# Altium PCB LTC2949.PcbDoc
Units mm, origin at the board's own origin, x right, y up, seen from the top; angles counter-clockwise.
Board outline 84.5 x 68.75 mm, 2 copper layers (Top Layer, Bottom Layer); 54 components, 56 nets, 195 pads, 8 vias.
Unrouted connection lines stored in the file: 1.
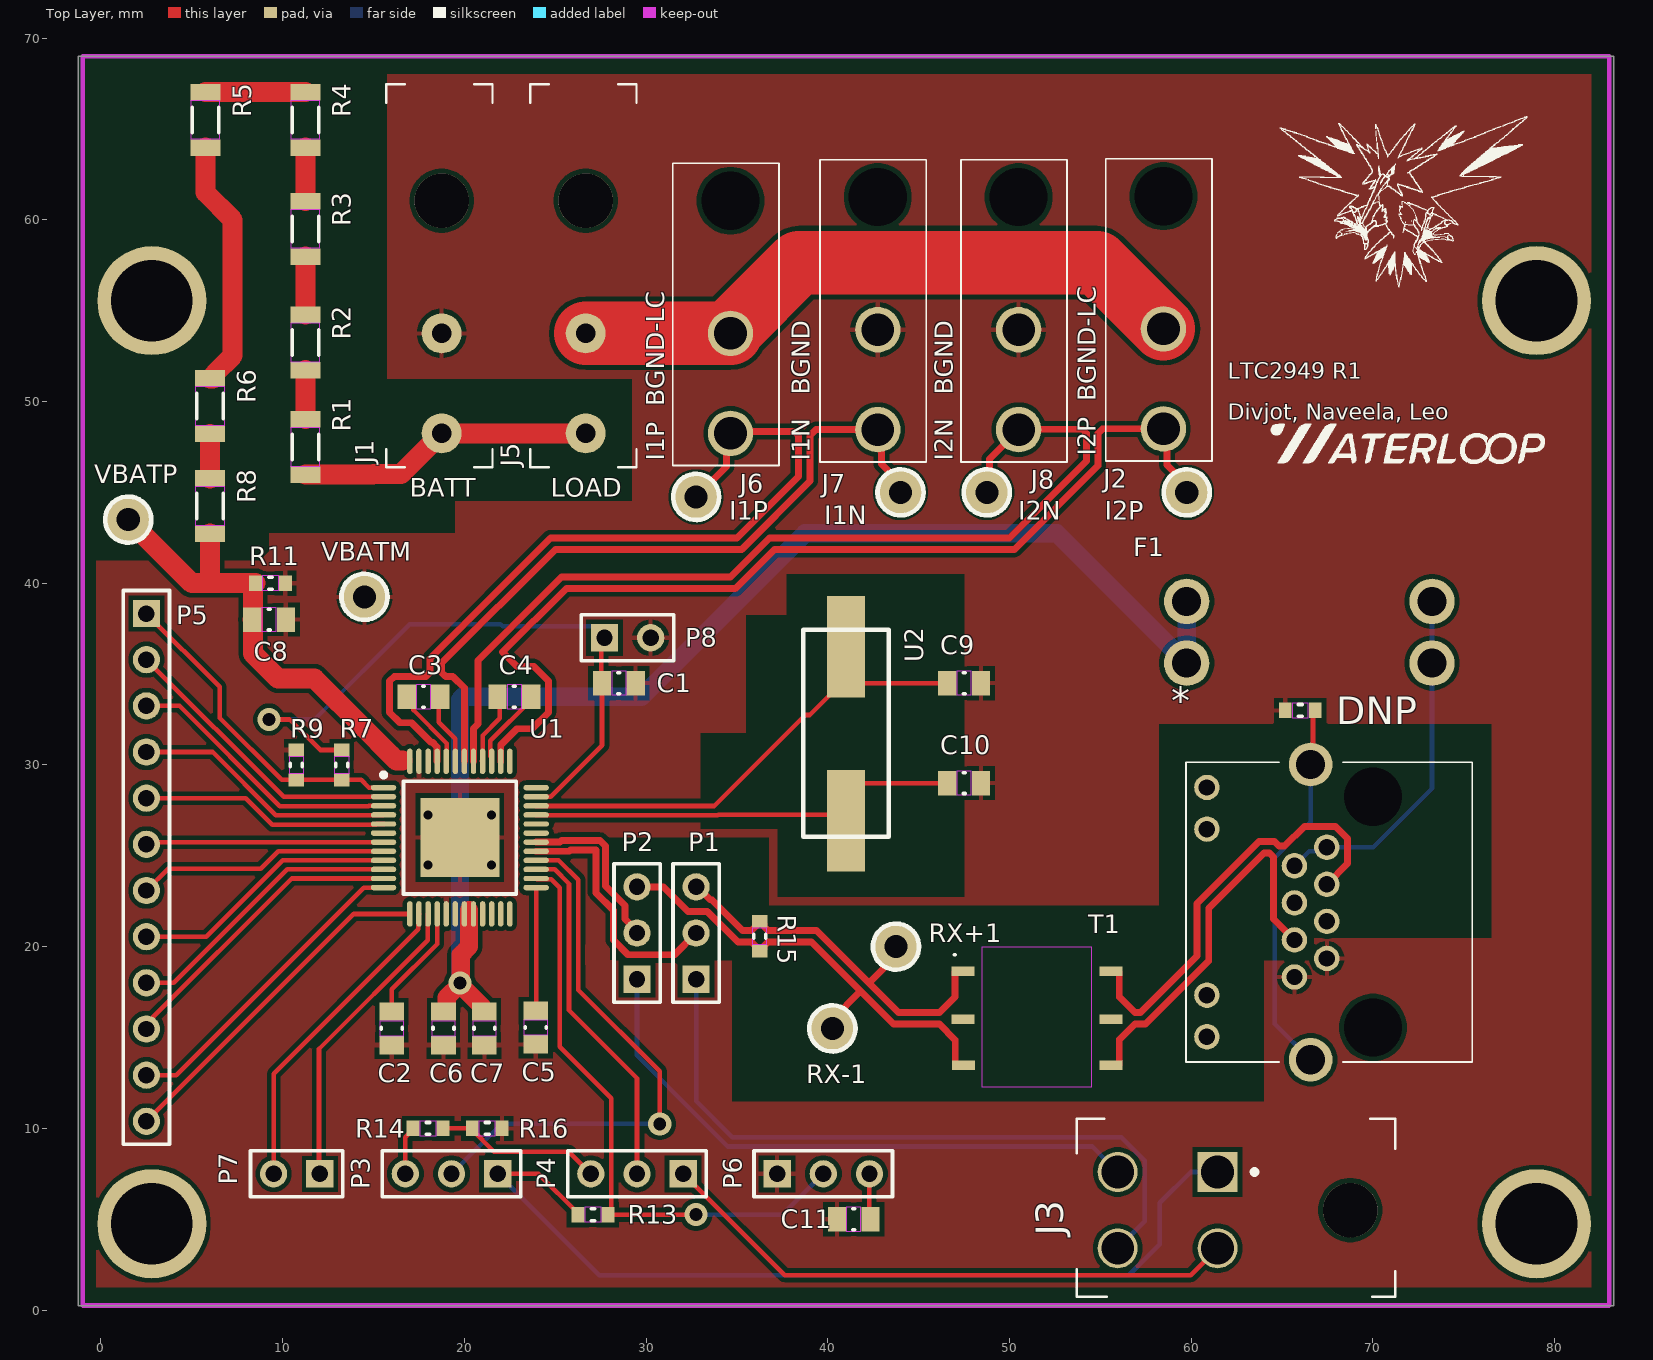
[diagram p0: Top Layer view]
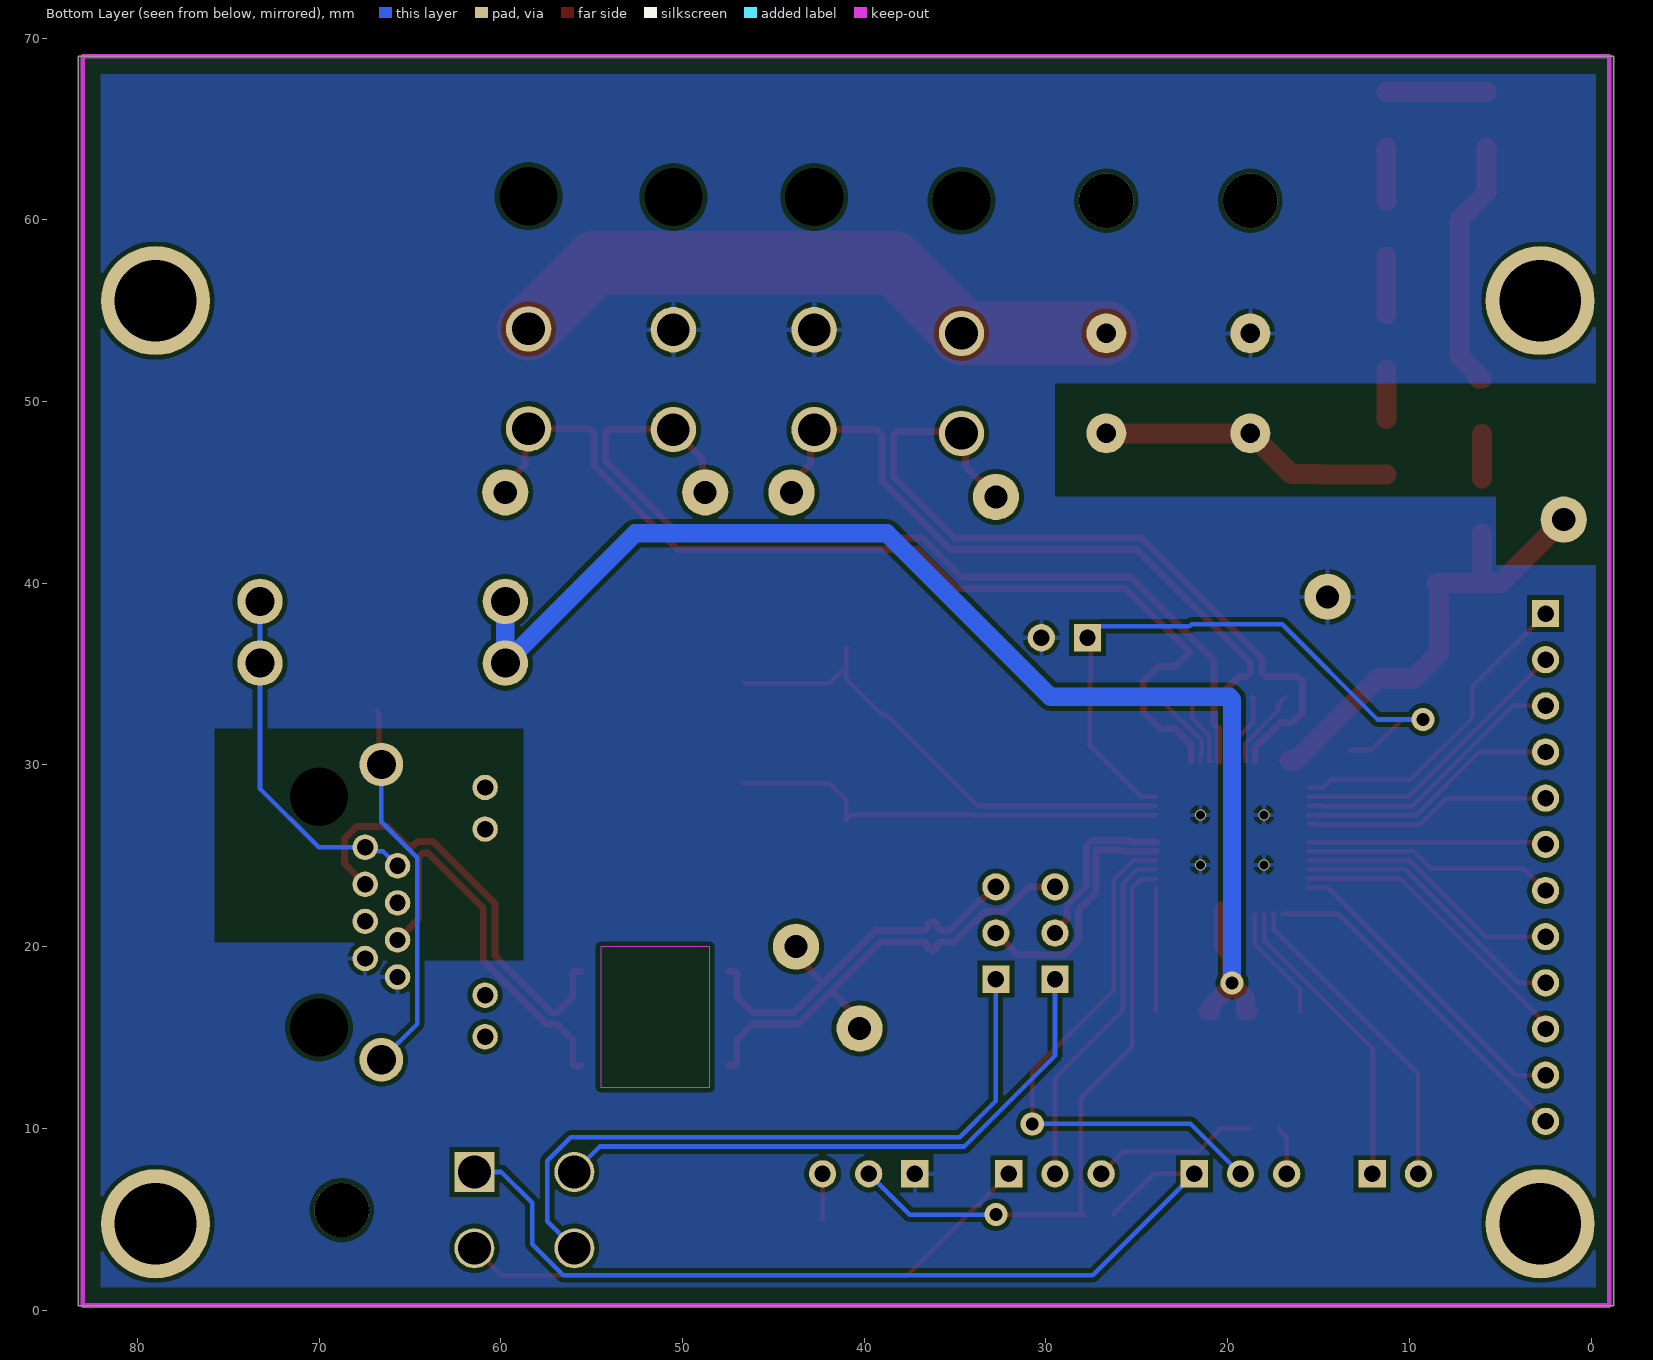
[diagram p1: Bottom Layer view, seen from below]
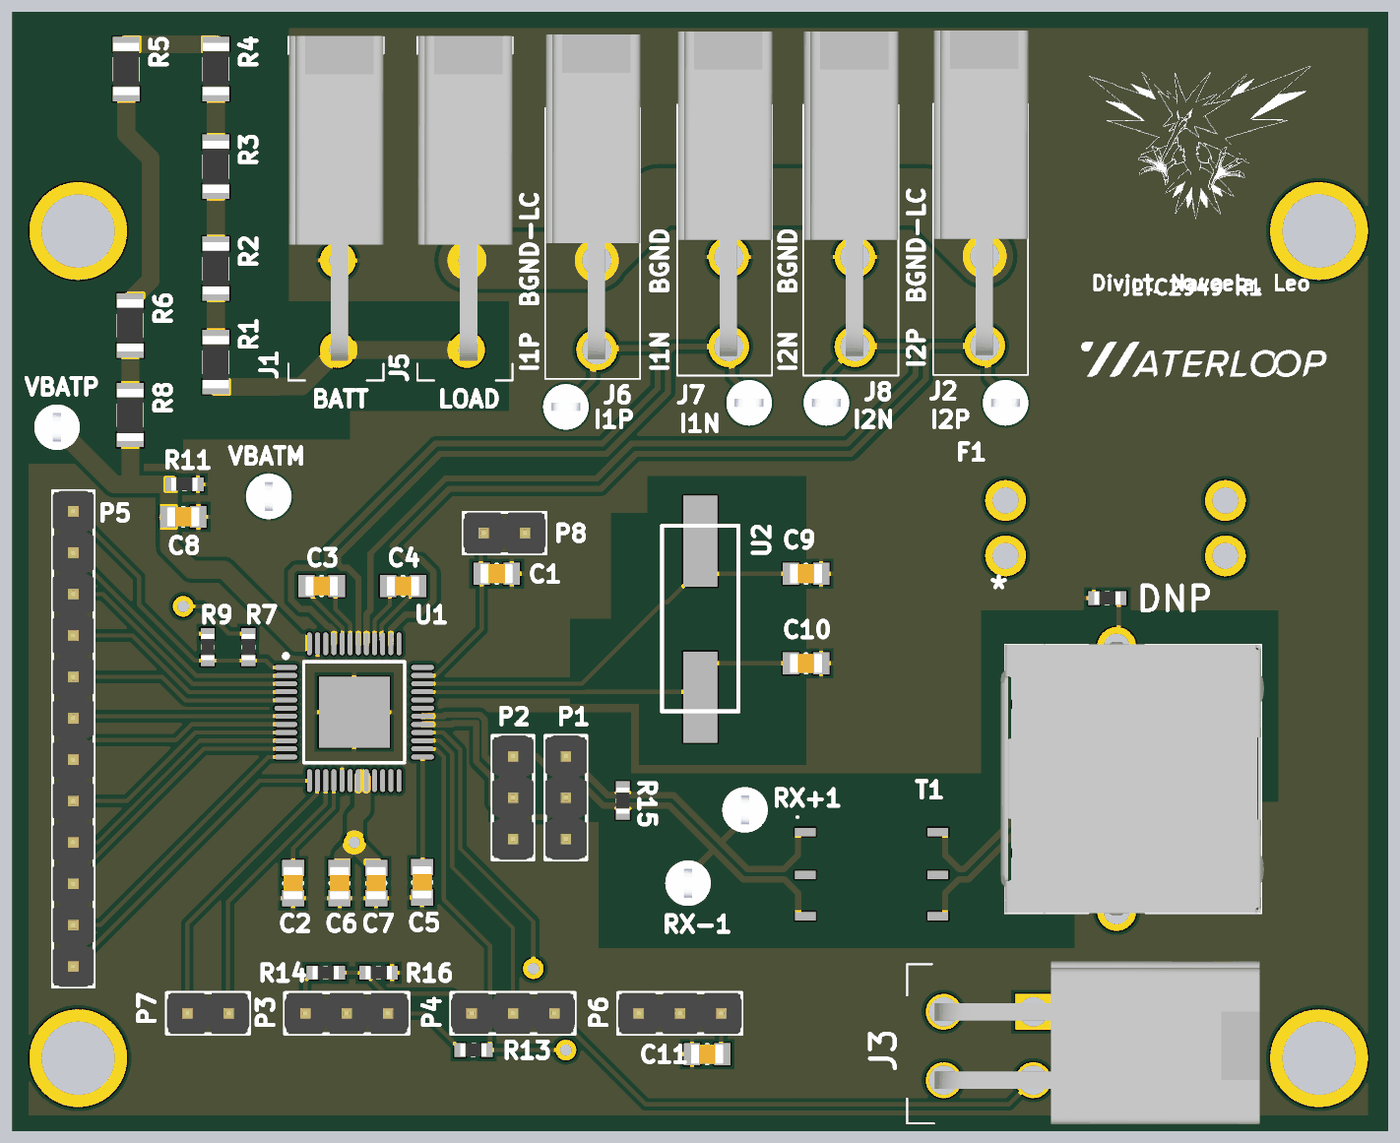
[diagram p2: 3D render of the assembled board from above, using the file's embedded part models]

## Layer stack, top to bottom
Top Solder: solder mask 0.0102, Solder Resist, Dk 3.5
Top Layer: signal copper 0.0356
Dielectric 1: dielectric 0.32, FR-4, Dk 4.8
Bottom Layer: signal copper 0.0356
Bottom Solder: solder mask 0.0102, Solder Resist, Dk 3.5

## Board outline
-1.25,0.25 -1.25,69 83.25,69 83.25,0.25

## Design rules (kind name [scope] priority, off if disabled: settings)
Clearance [All] p1: gap=0.254 ignorepadtopadclearanceinfootprint=FALSE except(0: Arc-Hole Track-Hole SMDPad-Hole THPad-Hole Via-Hole Fill-Hole Poly-Hole Region-Hole Text-Hole)
DiffPairsRouting [All] p1: maxlimit=0.254 minlimit=0.127 mostfreqgap=0.254 toplayer_minwidth=0.381 toplayer_maxwidth=0.381 toplayer_prefwidth=0.381 bottomlayer_minwidth=0.381 bottomlayer_maxwidth=0.381 bottomlayer_prefwidth=0.381 maxuncoupledlength=12.7
PolygonConnect [All] p1: connectstyle=Relief reliefconductorwidth=0.254 reliefentries=4 polygonreliefangle="90 Angle" airgapwidth=0.254
RoutingVias [All] p1: holewidth=0.711 width=1.27 viastyle="Through Hole" minholewidth=0.711 minwidth=1.27 maxholewidth=0.711 maxwidth=1.27
SolderMaskExpansion [All] p1: expansion=0.102 istentingtop=FALSE
Width [All] p1: maxlimit=25 minlimit=0.254 preferedwidth=0.254 minimp=50.000000 maximp=50.000000 favimp=50.000000
29 further rules are at their usual default settings.

## Classes and differential pairs
net class V[1..12]: V1 V2 V3 V4 V5 V6 V7 V8 V9 V10 V11 V12
component class "MAIN IC": C1 C2 C3 C4 C5 C6 C7 C8 C9 C10 C11 I1N I1P I2N I2P J2 J6 J7 J8 m P1 P2 P3 P4 P6 R1 R2 R3 R4 R5 R6 R7 R8 R9 R11 R13 R14 R15 R16 RX+1 RX-1 T1 U1 U2 VBATM VBATP
component class CONNECTORS: * DNP F1 J1 J3 J5 P5 P7 P8
differential pair TX_I: +TX_I_P -TX_I_N
differential pair I: +I_P -I_N
differential pair I2: +I2_P -I2_N
differential pair RX: +RX_P -RX_N
differential pair I1: +I1_P -I1_N

## Components (designator, comment, footprint, x,y, rotation, side; value= is the part's Value field where it differs from the comment)
* "MTJ-88ARX1-FSM-LV" MTJ-88ARX1-FSM-LV 67.714,22.168 r90 top
C1 "Capacitor - Nonpolarized" "0805 - Capacitor" 28.5,34.5 r180 top value=1uF
C2 "Nonpolarized Capacitor" "0805 - Capacitor" 16,15.5 r270 top value=1uF
C3 "Nonpolarized Capacitor" "0805 - Capacitor" 17.75,33.75 r0 top value=1uF
C4 "Nonpolarized Capacitor" "0805 - Capacitor" 22.75,33.75 r0 top value=1uF
C5 "Nonpolarized Capacitor" "0805 - Capacitor" 23.925,15.55 r270 top value=1uF
C6 "Nonpolarized Capacitor" "0805 - Capacitor" 18.85,15.5 r270 top value=1uF
C7 "Nonpolarized Capacitor" "0805 - Capacitor" 21.1,15.5 r270 top value=1uF
C8 "Nonpolarized Capacitor" "0805 - Capacitor" 9.25,38 r180 top value=4.7nF
C9 "Nonpolarized Capacitor" "0805 - Capacitor" 47.5,34.5 r180 top value=33pF
C10 "Nonpolarized Capacitor" "0805 - Capacitor" 47.5,29 r180 top value=33pF
C11 "Nonpolarized Capacitor" "0805 - Capacitor" 41.425,5 r0 top value=1uF
DNP "Resistor" "0603 - Resistor" 66,33 r0 top value=0
F1 "Fuse" 3557-2 59.75,35.6 r0 top
I1N "Test Point" "Test Point - 5002" 44,45 r0 top (schematic designator TP3)
I1P "Test Point" "Test Point - 5002" 32.75,44.75 r0 top (schematic designator TP1)
I2N "Test Point" "Test Point - 5002" 48.75,45 r0 top (schematic designator TP4)
I2P "Test Point" "Test Point - 5002" 59.75,45 r0 top (schematic designator TP2)
J1 "MOLEX0039301021" MOLEX0039301021 18.75,53.75 r180 top
J2 "MOLEX0050361758" Molex0050361758 58.468,48.5 r180 top
J3 "MOLEX0039301042" MOLEX0039301042 61.45,7.6 r90 top
J5 "MOLEX0039301021" MOLEX0039301021 26.677,53.75 r180 top
J6 "MOLEX0050361758" Molex0050361758 34.645,48.25 r180 top
J7 "MOLEX0050361758" Molex0050361758 42.75,48.45 r180 top
J8 "MOLEX0050361758" Molex0050361758 50.5,48.45 r180 top
P1 "1x3 Header" HDR1X3 32.75,18.21 r90 top
P2 "1x3 Header" HDR1X3 29.5,18.21 r90 top
P3 "1x3 Header" HDR1X3 21.83,7.5 r180 top
P4 "1x3 Header" HDR1X3 32.04,7.5 r180 top
P5 "1x12 Header" HDR1X12 2.5,38.33 r270 top
P6 "1x3 Header" HDR1X3 37.21,7.5 r0 top
P7 "1x2 Header" HDR1X2 12.04,7.5 r180 top
P8 "1x2 Header" HDR1X2 27.71,37 r0 top
R1 "Resistor" "1206 - Resistor" 11.25,47.5 r270 top value=49.9k
R2 "Resistor" "1206 - Resistor" 11.25,53.25 r270 top value=49.9k
R3 "Resistor" "1206 - Resistor" 11.25,59.5 r270 top value=49.9k
R4 "Resistor" "1206 - Resistor" 11.25,65.5 r270 top value=49.9k
R5 "Resistor" "1206 - Resistor" 5.75,65.5 r90 top value=49.9k
R6 "Resistor" "1206 - Resistor" 6,49.75 r90 top value=49.9k
R7 "Resistor" "0603 - Resistor" 13.25,30 r90 top value=10k
R8 "Resistor" "1206 - Resistor" 6,44.25 r90 top value=49.9k
R9 "Resistor - Variable" "0603 - Resistor" 10.75,30 r270 top
R11 "Resistor" "0603 - Resistor" 9.325,40 r180 top value=10k
R13 "Resistor" "0603 - Resistor" 27.075,5.25 r0 top value=5k
R14 "Resistor" "0603 - Resistor" 18,10 r180 top value=3k
R15 "Resistor" "0603 - Resistor" 36.25,20.575 r90 top value=120
R16 "Resistor" "0603 - Resistor" 21.25,10 r0 top value=1k
RX+1 "Test Point" "Test Point - 5002" 43.75,20 r90 top
RX-1 "Test Point" "Test Point - 5002" 40.25,15.5 r90 top
T1 "HM2101NLT" HM2101NLT 51.5,16 r270 top
U1 "LTC2949" LTC2949 19.75,26 r0 top
U2 "ABLS-4.000MHZ-K4T" ABLS_4MHZ-K4T 41,31.75 r90 top
VBATM "Test Point" "Test Point - 5002" 14.5,39.25 r90 top
VBATP "Test Point" "Test Point - 5002" 1.5,43.5 r90 top

## Footprints (in the part's own frame and the unit in brackets; to place one, negate y for a bottom-side part, rotate by r counter-clockwise, add the part's x,y. Pads: shape width x height; smd on the part's side, far side on the other; paste and mask are expansions set on the pad)
"0603 - Resistor" [mm] "0603 Chip Resistor - IPC Medium Density"
  rect 0.7x0.85 smd: 1(-0.825,0) 2(0.825,0)
  Top Layer keep-out region: -0.45,0.4 -0.45,-0.4 0.45,-0.4 0.45,0.4
  silkscreen extent -0.1,-0.33 0.1,0.33, body extent -0.8,-0.4 0.8,0.4, height 0.45
"0805 - Capacitor" [mm] "0805 Chip Capacitor - IPC Medium Density"
  rect 1x1.35 smd: 1(-0.925,0) 2(0.925,0)
  Top Layer keep-out region: -0.4,0.65 -0.4,-0.65 0.4,-0.65 0.4,0.65
  silkscreen extent -0.05,-0.58 0.05,0.58, body extent -1,-0.6 1,0.6, height 1.2
"1206 - Resistor" [mm] "1206 Chip Resistor - IPC Medium Density"
  rect 0.9x1.65 smd: 1(-1.525,0) 2(1.525,0)
  Top Layer keep-out region: -1.05,0.8 -1.05,-0.8 1.05,-0.8 1.05,0.8
  silkscreen extent -0.7,-0.72 0.7,0.72, body extent -1.6,-0.8 1.6,0.8, height 0.55
3557-2 [mm] "Fuse Holder"
  round 2.5 hole 1.6: 1(0,0) 1(0,3.4) 2(13.5,0) 2(13.5,3.4)
ABLS_4MHZ-K4T [mm]
  rect 5.6x2.1 smd: 1(4.75,0) 2(-4.826,0)
  silkscreen extent -5.7,-2.35 5.7,2.35
HDR1X2 [mm] "Connector; Header; 2 Position"
  rect 1.5x1.5 hole 0.9: 1(0,0)
  round 1.5 hole 0.9: 2(2.54,0)
  silkscreen extent -1.27,-1.27 3.81,1.27, body extent -1.27,-1.27 3.81,1.27, height 8.54
HDR1X3 [mm] "Connector; Header; 3 Position"
  rect 1.5x1.5 hole 0.9: 1(0,0)
  round 1.5 hole 0.9: 2(2.54,0) 3(5.08,0)
  silkscreen extent -1.27,-1.27 6.35,1.27, body extent -1.27,-1.27 6.35,1.27, height 8.54
HDR1X12 [mm] "Connector; Header; 12 Position"
  rect 1.5x1.5 hole 0.9: 1(0,0)
  round 1.5 hole 0.9: 2(2.54,0) 3(5.08,0) 4(7.62,0) 5(10.16,0) 6(12.7,0) 7(15.24,0) 8(17.78,0) 9(20.32,0) 10(22.86,0) 11(25.4,0) 12(27.94,0)
  silkscreen extent -1.27,-1.27 29.21,1.27, body extent -1.27,-1.27 29.21,1.27, height 8.54
HM2101NLT [mm]
  rect 0.51x1.27 smd: 1(-2.64,-4.05) 2(0,-4.05) 3(2.53,-4.045) 4(2.53,4.095) 5(0,4.095) 6(-2.64,4.095)
  silkscreen extent -3.55,-4.55 -3.55,-4.5, body extent -3.88,-4.35 3.78,4.45, height 0.25
LTC2949 [mm] "LQFP, 48-Leads, IPC Medium Density"
  oval 1.4x0.3 smd: 1(-4.2,2.75) 2(-4.2,2.25) 3(-4.2,1.75) 4(-4.2,1.25) 5(-4.2,0.75) 6(-4.2,0.25) 7(-4.2,-0.25) 8(-4.2,-0.75) 9(-4.2,-1.25) 10(-4.2,-1.75) 11(-4.2,-2.25) 12(-4.2,-2.75) 25(4.2,-2.75) 26(4.2,-2.25) 27(4.2,-1.75) 28(4.2,-1.25) 29(4.2,-0.75) 30(4.2,-0.25) 31(4.2,0.25) 32(4.2,0.75) 33(4.2,1.25) 34(4.2,1.75) 35(4.2,2.25) 36(4.2,2.75)
  oval 0.3x1.4 smd: 13(-2.75,-4.2) 14(-2.25,-4.2) 15(-1.75,-4.2) 16(-1.25,-4.2) 17(-0.75,-4.2) 18(-0.25,-4.2) 19(0.25,-4.2) 20(0.75,-4.2) 21(1.25,-4.2) 22(1.75,-4.2) 23(2.25,-4.2) 24(2.75,-4.2) 37(2.75,4.2) 38(2.25,4.2) 39(1.75,4.2) 40(1.25,4.2) 41(0.75,4.2) 42(0.25,4.2) 43(-0.25,4.2) 44(-0.75,4.2) 45(-1.25,4.2) 46(-1.75,4.2) 47(-2.25,4.2) 48(-2.75,4.2)
  rect 4.35x4.35 smd: 49(0,0)
  silkscreen extent -4.32,-3.1 3.1,3.57, body extent -3.5,-3.5 3.5,3.5, height 1.6
MOLEX0039301021 [mm] "2 connector header through hole right angle molex"
  round 2.2 hole 1.07: 1(0,5.5) 2(0,0)
  round 3 hole 3: M1(0,-7.3)
  silkscreen extent -2.79,-13.72 3.05,7.37, body extent -2.79,-13.78 3.01,6.16, height 11.4
MOLEX0039301042 [mm] "CONN HEADER R/A 4POS 4.2MM"
  rect 2.2x2.2 hole 1.8: 1(0,0)
  round 2.2 hole 1.8: 2(-4.2,0) 3(0,5.5) 4(-4.2,5.5)
  round 3 hole 3: M1(-2.1,-7.3)
  silkscreen extent -6.86,-9.78 2.92,7.75, body extent -6.9,-13.9 3.1,6.04, height 11.01
Molex0050361758 [mm]
  round 2.5 hole 1.8: 1(0,0) 2(0,-5.5)
  round 2.5 hole 3.2: M1(0,-12.8)
  silkscreen extent -2.67,-14.86 3.18,1.78, body extent -2.67,-19.37 3.13,0.57, height 11.4
MTJ-88ARX1-FSM-LV [mm] "RJ45 Connector"
  round 1.4 hole 0.9: 1(3.302,0.254) 2(2.282,2.034) 3(1.262,0.254) 4(0.242,2.034) 5(-0.778,0.254) 6(-1.798,2.034) 7(-2.818,0.254) 8(-3.838,2.034) 9(6.592,6.854) 10(4.302,6.854) 11(-4.838,6.854) 12(-7.128,6.854)
  round 2.4 hole 1.6: MH1(7.857,1.144) MH2(-8.393,1.144)
  round 1.6 hole 3.2 unplated: MH3(6.082,-2.286) MH4(-6.618,-2.286)
  silkscreen extent -8.52,-7.75 7.98,8, body extent -8.65,-7.91 8.15,8.26, height 12.95
"Test Point - 5002" [mm] "5002 - PCB TEST POINT WHITE .040"
  round 2.54 hole 1.27: 1(0,0)
  silkscreen extent -1.27,-1.27 1.27,1.27, body extent -1.27,-1.27 1.27,1.27, height 4.57

## Part data
*: "RJ45 Connector"
C1: "Nonpolarized Capacitor"
C2 C3 C4 C5 C6 C7 C8 C9 C10 C11: library part "Capacitor - Nonpolarized"
J1 J5: "Connector Header Through Hole, Right Angle 2 pin 0.165\" (4.20mm)"
J2 J6 J7 J8: "Connector Header Through Hole, Right Angle 2 position -", Manufacturer=Molex, Manufacturer Part Number=0050361758, Supplier Part Number=0050361758-ND, ComponentLink1Description=Datasheet, ComponentLink1URL=https://www.molex.com/pdm_docs/ps/PS-5556-001.pdf, Supplier=DigiKey
J3: "Connector Header Through Hole, Right Angle 4 position 0.165\" (4.20mm)", Manufacturer=Molex, Manufacturer Part Number=0039301042, Supplier Part Number=WM21364-ND, ComponentLink1Description=Datasheet, ComponentLink1URL=https://www.molex.com/pdm_docs/sd/039301042_sd.pdf, Supplier=Digikey
P1 P2 P3 P4 P6: "1x3 Pin Header"
P5: "1x12 Pin Header"
P7 P8: "1x2 Pin Header"
R9: "Variable Resistor"
T1: "Pulse Transformer 1:1 Surface Mount 150µH, 450µH"
U1: Manufacturer="Analog Devices", Manufacturer Part Number=LTC2949ILXE#3ZZPBF, Supplier Part Number=584-2949ILXE3ZZPBF, Supplier=Mouser
U2: "Crystal Oscillator 4MHz 18pF"

## Free pads (board coordinates)
  round 6 hole 4.5: 33(2.8,4.75) 33(2.8,55.55) 33(79,4.75) 33(79,55.55)

## Via types
v1: diameter 0.6, hole 0.5, Top Layer to Bottom Layer, 4 vias
v2: diameter 1.27, hole 0.711, Top Layer to Bottom Layer, 4 vias

## Nets (pads, with @x,y where several pads share a name; then routed paths per layer and width w, separated by ;. In a path a pad name is that pad's centre, name@x,y a point inside that pad or via, vN(x,y) a via of type N, cw(c..) or ccw(c..) an arc to the next point about the centre after c; other vN are vias at no path point)
+12: C6.1 C7.1 F1.1 U1.19 U1.20 | length 74.2
  Top Layer w1: C6.1 19.025,16.425 19.025,17.202 v2@19.75,17.927 ; 20.25,22 20.25,20 19.802,19.552 19.802,18.052 v2(19.75,18) v2@19.75,17.927 ; C7.1 20.925,16.425 20.925,16.752 v2@19.75,17.927
  Bottom Layer w1: v2(19.75,18) 19.75,33.601 19.899,33.75 29.75,33.75 38.75,42.75 52.6,42.75 59.75,35.6 F1.1@59.75,39
BGND: *.7 *.8 C1.1 C2.2 C5.2 C6.2 C7.2 C8.1 C9.1 C10.1 C11.1 DNP.1 J1.2 J7.2 J8.2 P6.1 P8.2 R9.1 R11.1 R16.2 U1.17 U1.18 U1.47 U1.49 VBATM.1
  other v1: 18,24.5 21.5,24.5 18,27.25 21.5,27.25
CLKI: C10.2 U1.33 U2.2 | length 24.3
  Top Layer w0.254: U1.33 23.966,27.234 33.952,27.234 33.968,27.25 40.674,27.25 U2.2 41,28.077 41.923,29 C10.2
CLKO: C9.2 U1.34 U2.1 | length 27.7
  Top Layer w0.254: U1.34 23.958,27.742 33.742,27.742 38.75,32.75 39,32.75 41,34.75 U2.1@41,35.423 ; U2.1 U2.1@41,35.423 ; C9.2 41.923,34.5 U2.1@41,35.423
I1_N: I1N.1 J7.1 U1.42 | length 40.9
  Top Layer w0.381: U1.42 20,34.229 ; 20,34.25 20,34.229 ; I1N.1 44,45.516 42.956,46.56 42.956,48.244 J7.1 39.338,48.45 39.015,48.127 39.015,45.617 35.263,41.865 25.013,41.865 18.75,35.602 18.75,35.093 18.973,34.87 19.359,34.87 20,34.229
I1_P: I1P.1 J6.1 U1.45 | length 43.9
  Top Layer w0.381: U1.45 18.5,31 18.25,31.25 18.161,31.25 17.09,32.322 16.45,32.322 15.88,32.891 15.88,34.609 16.141,34.87 17.892,34.87 18.115,35.093 18.115,35.865 24.75,42.5 35,42.5 38.38,45.88 38.38,48.127 38.157,48.35 34.745,48.35 34.428,48.033 34.428,46.428 I1P.1
I2_N: I2N.1 J8.1 U1.41 | length 53.2
  Top Layer w0.381: U1.41 20.5,32 20.753,32.253 20.753,35.753 25.35,40.35 34.646,40.35 36.796,42.5 50,42.5 54.23,46.73 54.23,48.252 54.007,48.475 50.525,48.475 J8.1 48.891,46.841 48.891,45.141 I2N.1
I2_P: I2P.1 J2.1 U1.38 | length 55.7
  Top Layer w0.381: U1.38 22,31.091 22.901,31.991 23.72,31.991 24.619,32.891 24.619,34.609 23.822,35.407 22.901,35.407 22.103,36.205 25.613,39.715 34.909,39.715 37.059,41.865 50.263,41.865 54.865,46.467 54.865,48.252 55.113,48.5 J2.1 58.656,48.312 58.656,46.51 59.75,45.416 I2P.1
I_N: P2.2 U1.30 | length 9.5
  Top Layer w0.381: U1.30 25.25,25.75 25.337,25.837 27.46,25.837 27.758,25.54 27.758,23.343 28.834,22.267 28.834,21.533 29.5,20.867 P2.2
I_P: P1.2 U1.29 | length 14.1
  Top Layer w0.381: U1.29 25.75,25.25 25.829,25.329 27.25,25.329 27.25,22.953 28.199,22.004 28.199,20.362 29.005,19.556 31.555,19.556 P1.2
IBIAS: P3.2 U1.28 | length 30.6
  Top Layer w0.254: U1.28 23.958,24.758 25.179,24.758 26.266,23.671 26.266,17.617 30.75,13.133 v2(30.75,10.25)
  Bottom Layer w0.254: P3.2 22.04,10.25 v2(30.75,10.25)
ICMP: P4.2 U1.27 | length 19.6
  Top Layer w0.254: U1.27 24.968,24.25 25.758,23.46 25.758,16.492 29.5,12.75 P4.2
IOVCC: P6.2 R13.2 U1.26 | length 33.5
  Top Layer w0.254: U1.26 23.981,23.719 24.781,23.719 25.25,23.25 25.25,14.5 28.091,11.659 28.091,5.441 R13.2 v2(32.75,5.25)
  Bottom Layer w0.254: v2(32.75,5.25) 37.5,5.25 P6.2
Net*_1: *.1 *.2 F1.2 | length 19.6
  Bottom Layer w0.254: *.2 66.481,25.251 67.241,25.251 *.1 70.022,25.47 73.25,28.698 73.25,35.6 F1.2@73.25,39
Net*_MH1: *.MH1 *.MH2 DNP.2 | length 21
  Top Layer w0.254: *.MH1 66.697,30.153 66.697,32.872 DNP.2
  Bottom Layer w0.254: *.MH2 64.599,15.746 64.599,24.898 66.57,26.869 *.MH1
NetC2_1: C2.1 U1.16 | length 6.4
  Top Layer w0.254: C2.1 16,17.649 18.5,20.149 U1.16
NetC3_1: C3.1 U1.44 | length 4.5
  Top Layer w0.254: C3.1 17.198,33.377 17.198,33.021 19.039,31.18 19.039,30.473 19,30.434 U1.44
NetC3_2: C3.2 U1.43 | length 4
  Top Layer w0.254: C3.2 18.594,33.669 18.594,32.344 19.5,31.438 19.5,30.215 U1.43
NetC4_1: C4.1 U1.40 | length 4
  Top Layer w0.254: U1.40@20.969,30.214 20.983,30.2 U1.40 21,31.618 21.941,32.559 21.941,33.634 C4.1
NetC4_2: C4.2 U1.39 | length 4.5
  Top Layer w0.254: U1.39 21.5,30.401 21.429,30.473 21.429,31.329 23.675,33.575 C4.2
NetC5_1: C5.1 U1.25 | length 6.8
  Top Layer w0.254: C5.1 23.95,16.5 U1.25
NetC8_2: C8.2 R8.1 R11.2 U1.48 VBATP.1 | length 25.8
  Top Layer w1.1: VBATP.1 5,40 6,40 ; R8.1 6,40 ; 16.58,30.25 16.25,30.25 15.952,30.548 14.5,32 11.75,34.75 9.75,34.75 8.375,36.125 8.375,37.95 C8.2 8.375,38.05 8.375,39.875 R11.2 6,40
NetC11_2: C11.2 P6.3 | length 2.5
  Top Layer w0.254: P6.3 42.29,5.06 C11.2
NetJ2_2: J2.2 J5.2 J6.2 | length 35
  Top Layer w3.5: J5.2 J6.2 34.645,53.895 38.396,57.646 54.822,57.646 J2.2
NetJ3_1: J3.1 P3.1 R13.1 | length 51
  Top Layer w0.254: P3.1 24.075,7.5 26.25,5.325 R13.1
  Bottom Layer w0.254: P3.1 27.411,1.919 56.563,1.919 58.266,3.622 58.266,5.897 59.969,7.6 J3.1
NetJ3_2: J3.2 P4.1 | length 32.3
  Top Layer w0.254: P4.1 37.621,1.919 59.969,1.919 J3.2
NetJ3_3: J3.3 P2.1 | length 33.3
  Bottom Layer w0.254: P2.1 29.5,14 34.5,9 54.55,9 J3.3
NetJ3_4: J3.4 P1.1 | length 38.2
  Bottom Layer w0.254: P1.1 32.75,11.508 34.75,9.508 56.136,9.508 57.431,8.213 57.431,4.881 J3.4
NetP3_3: P3.3 R14.2 | length 2.7
  Top Layer w0.254: P3.3 16.75,9.5 17.175,9.925 R14.2
NetP7_1: P7.1 U1.15 | length 16.8
  Top Layer w0.254: P7.1 12,7.54 12,14.367 17.992,20.359 17.992,21.792 U1.15
NetP7_2: P7.2 U1.14 | length 17.6
  Top Layer w0.254: P7.2 9.5,13 17.469,20.969 17.469,21.769 U1.14
NetR1_1: R1.1 R2.2 | length 2.7
  Top Layer w1.1: R1.1 R2.2
NetR2_1: R2.1 R3.2 | length 3.2
  Top Layer w1.1: R2.1 R3.2
NetR3_1: R3.1 R4.2 | length 2.9
  Top Layer w1.1: R3.1 R4.2
NetR4_1: R4.1 R5.2 | length 5.5
  Top Layer w1.1: R5.2 R4.1
NetR5_1: R5.1 R6.2 | length 13.9
  Top Layer w1.1: R5.1 5.75,61.5 7.25,60 7.25,52.525 6.275,51.55 6.275,51.375 6.175,51.275 R6.2
NetR6_1: R6.1 R8.2 | length 2.5
  Top Layer w1.1: R8.2 R6.1
RDIVIDER: P4.3 R14.1 R16.1 | length 9.2
  Top Layer w0.254: R14.1 R16.1 20.425,9.925 21.63,8.72 25.74,8.72 P4.3
RX_N: P2.3 R15.1 RX-1.1 T1.3 | length 25.8
  Top Layer w0.381: P2.3 30.959,23.29 32.305,21.945 33.364,21.945 35.051,20.258 35.792,20.258 36.016,20.034 36.016,19.91 36.175,19.75 R15.1 ; R15.1@36.485,19.91 36.485,20.034 36.708,20.258 39.104,20.258 41.806,17.556 ; RX-1.1 40.25,16 41.806,17.556 ; T1.3 47.075,13.47 47.011,13.535 47.011,14.873 46.147,15.736 43.625,15.736 41.806,17.556
RX_P: P1.3 R15.2 RX+1.1 T1.1 | length 22.2
  Top Layer w0.381: P1.3 32.822,23.29 33.533,22.58 33.627,22.58 35.314,20.893 35.792,20.893 36.016,21.116 36.016,21.24 36.175,21.4 R15.2 ; R15.2@36.485,21.24 36.485,21.116 36.708,20.893 39.367,20.893 42.255,18.005 ; RX+1.1 43.75,19.5 42.255,18.005 ; T1.1 47.07,18.64 47.006,18.576 47.006,17.23 46.147,16.371 43.888,16.371 42.255,18.005
TX_I_N: *.6 T1.4 | length 21.4
  Top Layer w0.381: T1.4 55.975,13.47 56.04,13.535 56.04,14.879 56.898,15.738 57.476,15.738 60.961,19.222 60.961,22.112 63.997,25.147 64.312,25.147 64.535,24.924 64.535,21.515 *.6
TX_I_P: *.3 T1.6 | length 24.1
  Top Layer w0.381: T1.6 55.975,18.64 56.039,18.576 56.039,17.231 56.898,16.373 57.213,16.373 60.326,19.485 60.326,22.375 63.734,25.782 64.575,25.782 64.827,25.531 65.142,25.531 66.226,26.614 67.934,26.614 68.604,25.944 68.604,24.574 *.3
V1: P5.1 R7.1 R9.2 U1.1 | length 18
  Top Layer w0.254: P5.1 6.533,34.296 6.533,32.585 9.944,29.175 R7.1 14.325,29.175 14.75,28.75 U1.1
V2: P5.2 U1.2 | length 16.2
  Top Layer w0.254: P5.2 10.048,28.242 12.742,28.242 12.75,28.25 14.5,28.25 14.508,28.242 15.542,28.242 U1.2
V3: P5.3 U1.3 | length 15.3
  Top Layer w0.254: P5.3 4.322,33.25 9.838,27.734 14.733,27.734 14.749,27.75 U1.3
V4: P5.4 U1.4 | length 14.5
  Top Layer w0.254: P5.4 6.143,30.71 9.627,27.226 14.943,27.226 14.959,27.242 15.542,27.242 U1.4
V5: P5.5 U1.5 | length 13.7
  Top Layer w0.254: P5.5 7.965,28.17 9.417,26.718 15.154,26.718 15.186,26.75 U1.5
V6: P5.6 U1.7 | length 13.1
  Top Layer w0.254: P5.6 2.62,25.75 U1.7
V7: P5.7 U1.8 | length 13.9
  Top Layer w0.254: P5.7 3.699,24.289 8.789,24.289 9.75,25.25 U1.8
V8: P5.8 U1.9 | length 14.8
  Top Layer w0.254: P5.8 5.8,20.55 10,24.75 U1.9
V9: P5.9 U1.10 | length 15.6
  Top Layer w0.254: P5.9 4.01,18.01 10.25,24.25 U1.10
V10: P5.10 U1.11 | length 16.6
  Top Layer w0.254: P5.10 2.5,15.75 10.5,23.75 U1.11
V11: P5.11 U1.12 | length 17.3
  Top Layer w0.254: P5.11 4.149,12.93 14.469,23.25 U1.12
V12: P5.12 U1.13 | length 19.2
  Top Layer w0.254: P5.12 13.91,21.8 U1.13
VBAT: J1.1 J5.1 R1.2 | length 16.4
  Top Layer w1.1: R1.2 14.975,45.975 15,46 16.5,46 J1.1 J5.1
VREF: C1.2 P8.1 R7.2 U1.35 | length 36.5
  Top Layer w0.254: v2(9.25,32.5) 10.389,32.5 12.064,30.825 R7.2 ; U1.35 24.751,28.25 27.575,31.074 C1.2 27.575,34.635 27.53,34.68 27.53,36.82 P8.1
  Bottom Layer w0.254: v2(9.25,32.5) 11.75,32.5 17,37.75 21.98,37.75 22.107,37.623 27.087,37.623 P8.1
pads on no net: *.4 *.5 *.9 *.10 *.11 *.12 *.MH3 *.MH4 J1.M1 J2.M1 J3.M1 J5.M1 J6.M1 J7.M1 J8.M1 T1.2 T1.5 U1.6 U1.21 U1.22 U1.23 U1.24 U1.31 U1.32 U1.36 U1.37 U1.46

## Polygon pours and split planes (outlines as drawn)
BGND on Top Layer "BGND_L01_P000" (solid, remove dead copper, pour order 0): -0.25,68 82,68 82,1.25 -0.25,1.25
BGND on Top Layer "BGND_L01_P002" (solid, pour order 2): 26.651,19 28.25,19 28.25,26.5 26.75,26.5
BGND on Bottom Layer "BGND_L02_P001" (solid, remove dead copper, pour order 1): -0.25,68 82,68 82,1.25 -0.25,1.25

## Keep-outs
Keep-Out Layer:
  region: 48.5,20 54.5,20 54.5,12.25 48.5,12.25
  lines w0.254: -1,0.25 83,0.25 83,69 -1,69 -1,0.25

## Other copper
Top Layer:
  pour cut-out: -0.5,68.5 15.75,68.5 15.75,51.25 29.25,51.25 29.25,44.5 19.5,44.5 19.5,42.75 9.25,42.75 9.25,41.75 8.75,41.25 -0.5,41.25
  pour cut-out: 47.5,26 47.5,22.75 45.5,22.75 45.5,26
  pour cut-out: 28,26 36.75,26 36.75,22.25 58.25,22.25 58.25,32.25 76.5,32.25 76.5,20.5 66.75,20.5 66.75,19.25 64,19.25 64,11.5 34.75,11.5 34.75,19.25 28,19.25
  pour cut-out: 33,26.5 33,31.75 35.5,31.75 35.5,38.25 37.75,38.25 37.75,40.5 47.5,40.5 47.5,26 45.5,26 45.5,22.75 37.25,22.75 37.25,26.5
Bottom Layer:
  pour cut-out: 58.75,32 75.75,32 75.75,20.25 75.744,20.244 66.634,20.244 66.634,19.351 66.506,19.223 66.479,19.25 58.75,19.25
  pour cut-out: -0.25,51 29.5,51 29.5,44.75 5.25,44.75 5.25,41 -0.25,41

## Silkscreen, mask and mechanical layers (free items; w line width, h text height)
Top Overlay:
  drawing of 489 lines, arcs and shapes, not listed
  text "LTC2949 R1" at 62.02,51.25 h0.89
  text "Divjot, Naveela, Leo" at 62.02,49 h0.89
  text "I2P  BGND-LC" at 54.746,47.004 h1 r90
  text "I1P  BGND-LC" at 30.996,46.754 h1 r90
  text "I1N   BGND" at 38.996,46.754 h1 r90
  text "I2N   BGND" at 46.866,46.754 h1 r90
  text "BATT" at 17.004,44.754 h1.02
  text "LOAD" at 24.754,44.754 h1.02